# EAGLE board finacbv1 (EAGLE 9.1.0)

Size 100 x 80 mm. Coordinates in mm from the lower left corner, seen from the top.
Outline: 0,0 100,0 100,80 0,80 0,0
Copper layers (1*16): Top 0.035mm / dielectric 1.5mm / Bottom 0.035mm
Design rules "default": minimum track width 6mil, minimum drill 0.35mm, track to track 6mil, track to pad 6mil, pad to pad 6mil, via to via 6mil, smd to smd 6mil, copper to edge 40mil, drill to drill 6mil, minimum pad ring 10mil, minimum via ring 8mil, stop-mask expansion 4mil, vias tented up to drill 0mil, thermal gap 10mil

## Footprints (pad centres in the part's own frame; a part is rotated, then mirrored left to right if it is on the bottom)
C0603 = smd 0.889 x 0.889: 1 0,0.762; 2 0,-0.762
C0805 = smd 1.397 x 1.016: 1 0,1.016; 2 0,-1.016
0603-CAP = smd 1.1 x 1: 1 -0.85,0; 2 0.85,0
0402-CAP = smd 0.7 x 0.9: 1 -0.65,0; 2 0.65,0
HC49US = drill 0.813: 1 -2.413,0; 2 2.413,0
TC26H = drill 0.635: 1 -0.686,0; 2 0.686,0
LQFP64-05 = smd 1.2 x 0.25: 1 -5.915,3.759; 2 -5.915,3.251; 3 -5.915,2.743; 4 -5.915,2.261; 5 -5.915,1.753; 6 -5.915,1.245; 7 -5.915,0.762; 8 -5.915,0.254; 9 -5.915,-0.254; 10 -5.915,-0.762; 11 -5.915,-1.245; 12 -5.915,-1.753; 13 -5.915,-2.261; 14 -5.915,-2.743; 15 -5.915,-3.251; 16 -5.915,-3.759; 33 5.915,-3.759; 34 5.915,-3.251; 35 5.915,-2.743; 36 5.915,-2.261; 37 5.915,-1.753; 38 5.915,-1.245; 39 5.915,-0.762; 40 5.915,-0.254; 41 5.915,0.254; 42 5.915,0.762; 43 5.915,1.245; 44 5.915,1.753; 45 5.915,2.261; 46 5.915,2.743; 47 5.915,3.251; 48 5.915,3.759 | smd 0.25 x 1.2: 17 -3.759,-5.915; 18 -3.251,-5.915; 19 -2.743,-5.915; 20 -2.261,-5.915; 21 -1.753,-5.915; 22 -1.245,-5.915; 23 -0.762,-5.915; 24 -0.254,-5.915; 25 0.254,-5.915; 26 0.762,-5.915; 27 1.245,-5.915; 28 1.753,-5.915; 29 2.261,-5.915; 30 2.743,-5.915; 31 3.251,-5.915; 32 3.759,-5.915; 49 3.759,5.915; 50 3.251,5.915; 51 2.743,5.915; 52 2.261,5.915; 53 1.753,5.915; 54 1.245,5.915; 55 0.762,5.915; 56 0.254,5.915; 57 -0.254,5.915; 58 -0.762,5.915; 59 -1.245,5.915; 60 -1.753,5.915; 61 -2.261,5.915; 62 -2.743,5.915; 63 -3.251,5.915; 64 -3.759,5.915
LQFP32-08 = smd 1.3 x 0.4: 1 -4.493,2.8; 2 -4.493,2; 3 -4.493,1.2; 4 -4.493,0.4; 5 -4.493,-0.4; 6 -4.493,-1.2; 7 -4.493,-2; 8 -4.493,-2.8; 17 4.493,-2.8; 18 4.493,-2; 19 4.493,-1.2; 20 4.493,-0.4; 21 4.493,0.4; 22 4.493,1.2; 23 4.493,2; 24 4.493,2.8 | smd 0.4 x 1.3: 9 -2.8,-4.493; 10 -2,-4.493; 11 -1.2,-4.493; 12 -0.4,-4.493; 13 0.4,-4.493; 14 1.2,-4.493; 15 2,-4.493; 16 2.8,-4.493; 25 2.8,4.493; 26 2,4.493; 27 1.2,4.493; 28 0.4,4.493; 29 -0.4,4.493; 30 -1.2,4.493; 31 -2,4.493; 32 -2.8,4.493
LED-0805 = smd 0.889 x 1.27: + -0.889,0; - 0.889,0
F0805 = smd 1.397 x 1.016: 1 0,0.889; 2 0,-0.889
L0603 = smd 0.889 x 0.889: 1 -0.762,0; 2 0.762,0
R0603 = smd 0.889 x 0.889: 1 0,0.762; 2 0,-0.762
SOT-23 = smd 1.016 x 1.143: 1 -0.889,-1.016; 2 0.889,-1.016; 3 0,1.016
0603-RES = smd 1.1 x 1: 1 -0.85,0; 2 0.85,0
0402-RES = smd 0.7 x 0.9: 1 -0.65,0; 2 0.65,0
ALPS_SKHH = drill 1.016 pad 1.88: 1 -3.251,2.261; 2 3.251,2.261; 3 -3.251,-2.261; 4 3.251,-2.261; 5 0,-4.1
SOLDERJUMPER = smd 1.168 x 1.6: 1 -0.762,0; 2 0.762,0
SJ_3_PASTE2&3 = smd 0.635 x 1.27: 1 -0.813,0; 2 0,0; 3 0.813,0
SJ_2S-TRACE = smd 0.635 x 1.27: 1 -0.508,0; 2 0.508,0
SJ = smd 1.168 x 1.6: 1 -0.762,0; 2 0.762,0
PTH_39MIL = drill 0.991: 1 0,0
SOT-223 = smd 1.27 x 2.286: 1 -2.286,-3.175; 2 0,-3.175; 3 2.286,-3.175 | smd 3.556 x 2.159: PAD 0,3.175
QFN-24-4MM2 = smd 1.016 x 0.254: 1 -2.066,1.257; 2 -2.066,0.75; 3 -2.066,0.247; 4 -2.066,-0.287; 5 -2.066,-0.792; 6 -2.066,-1.297; 13 2.086,-1.297; 14 2.086,-0.792; 15 2.086,-0.287; 16 2.086,0.247; 17 2.086,0.75; 18 2.086,1.257 | smd 0.254 x 1.016: 7 -1.267,-2.122; 8 -0.762,-2.122; 9 -0.258,-2.122; 10 0.278,-2.122; 11 0.78,-2.122; 12 1.287,-2.122; 19 1.287,2.082; 20 0.78,2.082; 21 0.278,2.082; 22 -0.258,2.082; 23 -0.762,2.082; 24 -1.267,2.082 | smd 2.616 x 2.616: P$1 0.02,-0.01
16LPCC = smd 0.65 x 0.28: 1 -1.37,0.75; 2 -1.37,0.25; 3 -1.37,-0.25; 4 -1.37,-0.75; 9 1.37,-0.75; 10 1.37,-0.25; 11 1.37,0.25; 12 1.37,0.75 | smd 0.28 x 0.65: 5 -0.75,-1.37; 6 -0.25,-1.37; 7 0.25,-1.37; 8 0.75,-1.37; 13 0.75,1.37; 14 0.25,1.37; 15 -0.25,1.37; 16 -0.75,1.37
BLUETOOTH_SMD = smd 2 x 1: 1 -6.35,3.81; 2 -6.35,2.31; 3 -6.35,0.81; 4 -6.35,-0.69; 5 -6.35,-2.19; 6 -6.35,-3.69; 7 -6.35,-5.19; 8 -6.35,-6.69; 9 -6.35,-8.19; 10 -6.35,-9.69; 11 -6.35,-11.19; 12 -6.35,-12.69; 13 -6.35,-14.19; 22 6.65,-14.19; 23 6.65,-12.69; 24 6.65,-11.19; 25 6.65,-9.69; 26 6.65,-8.19; 27 6.65,-6.69; 28 6.65,-5.19; 29 6.65,-3.69; 30 6.65,-2.19; 31 6.65,-0.69; 32 6.65,0.81; 33 6.65,2.31; 34 6.65,3.81 | smd 1 x 1.8: 14 -5.1,-15.94; 15 -3.6,-15.94; 16 -2.1,-15.94; 17 -0.6,-15.94; 18 0.9,-15.94; 19 2.4,-15.94; 20 3.9,-15.94; 21 5.4,-15.94
MOLEX_SD-67503-010 = smd 2.54 x 0.508: 1 2.819,1.6; 2 2.819,0.8; 3 2.819,0; 4 2.819,-0.8; 5 2.819,-1.6 | smd 3.5 x 2: P$1 -2.121,-4.5; P$2 -2.121,4.5 | smd 3.2 x 2: P$3 2.544,-4.5; P$4 2.544,4.5 | drill 0.95: P$5 0,2.2; P$6 0,-2.2

## Placement (x,y rotation side)
C1  0.1uF  [C0603]  -24.13,58.42 0 top  (outside the outline)
C2  2.2uF  [C0805]  -46.99,45.72 0 top  (outside the outline)
C3  2.2uF  [C0805]  -53.34,45.72 0 top  (outside the outline)
C4  0.1uF  [C0603]  -29.21,58.42 0 top  (outside the outline)
C5  0.1uF  [C0603]  -34.29,58.42 0 top  (outside the outline)
C6  2.2uF  [C0805]  -59.69,45.72 0 top  (outside the outline)
C7  0.1uF  [C0603]  -39.37,58.42 0 top  (outside the outline)
C8  0.1uF  [C0603]  -44.45,58.42 0 top  (outside the outline)
C9  0.1uF  [C0603]  -49.53,58.42 0 top  (outside the outline)
C10  22pF  [C0603]  -54.61,58.42 0 top  (outside the outline)
C11  22pF  [C0603]  -59.69,58.42 0 top  (outside the outline)
C12  0.1uF  [C0603]  -15.24,63.5 0 top  (outside the outline)
C13  0.1uF  [0603-CAP]  -29.21,63.5 0 top  (outside the outline)
C14  2.2nF  [0603-CAP]  -33.02,63.5 0 top  (outside the outline)
C15  0.1uF  [0603-CAP]  -36.83,63.5 0 top  (outside the outline)
C16  10nF  [0603-CAP]  -40.64,63.5 0 top  (outside the outline)
C17  .1uF  [0402-CAP]  -15.24,67.31 0 top  (outside the outline)
C18  .22uF  [0402-CAP]  -19.05,67.31 0 top  (outside the outline)
C19  4.7uF  [0402-CAP]  -22.86,67.31 0 top  (outside the outline)
C20  2.2uF  [C0805]  -15.24,53.34 0 top  (outside the outline)
G1  16MHz  [HC49US]  -19.05,46.99 0 top  (outside the outline)
G2  32.768kHz  [TC26H]  -58.42,1.27 0 top  (outside the outline)
K1  MK20DX256VLH7  [LQFP64-05]  82.55,8.89 0 top
K2  MKL04Z32VLC4  [LQFP32-08]  -49.53,6.35 0 top  (outside the outline)
P1  [LED-0805]  -19.05,57.15 0 top  (outside the outline)
R1  FUSE  [F0805]  -21.59,53.34 0 top  (outside the outline)
R2  [L0603]  -19.05,62.23 0 top  (outside the outline)
R3  470R  [R0603]  -46.99,54.61 0 top  (outside the outline)
R4  [L0603]  -24.13,62.23 0 top  (outside the outline)
R5  33R  [R0603]  -52.07,54.61 0 top  (outside the outline)
R6  33R  [R0603]  -57.15,54.61 0 top  (outside the outline)
R7  [SOT-23]  -41.91,44.45 0 top  (outside the outline)
R8  470R  [R0603]  -62.23,54.61 0 top  (outside the outline)
R9  10k  [0603-RES]  -44.45,63.5 0 top  (outside the outline)
R10  10k  [0603-RES]  -48.26,63.5 0 top  (outside the outline)
R11  DNP  [0402-RES]  -26.67,67.31 0 top  (outside the outline)
R12  DNP  [0402-RES]  -30.48,67.31 0 top  (outside the outline)
S1  [ALPS_SKHH]  -30.48,39.37 0 top  (outside the outline)
SJ1  [SOLDERJUMPER]  -15.24,58.42 0 top  (outside the outline)
SJ2  [SJ_3_PASTE2&3]  -59.69,62.23 0 top  (outside the outline)
SJ3  [SJ_2S-TRACE]  -52.07,62.23 0 top  (outside the outline)
SJ4  [SJ_2S-TRACE]  -55.88,62.23 0 top  (outside the outline)
SJ5  [SJ]  -26.67,52.07 0 top  (outside the outline)
SJ6  [SJ]  -31.75,52.07 0 top  (outside the outline)
SJ7  [SJ]  -36.83,52.07 0 top  (outside the outline)
SJ8  [SJ]  -41.91,52.07 0 top  (outside the outline)
SX1  PIN  [PTH_39MIL]  -34.29,67.31 0 top  (outside the outline)
SX2  PIN  [PTH_39MIL]  -36.83,67.31 0 top  (outside the outline)
SX3  PIN  [PTH_39MIL]  -39.37,67.31 0 top  (outside the outline)
SX4  PIN  [PTH_39MIL]  -41.91,67.31 0 top  (outside the outline)
SX5  PIN  [PTH_39MIL]  -44.45,67.31 0 top  (outside the outline)
SX6  PIN  [PTH_39MIL]  -46.99,67.31 0 top  (outside the outline)
SX7  PIN  [PTH_39MIL]  -49.53,67.31 0 top  (outside the outline)
SX8  PIN  [PTH_39MIL]  -52.07,67.31 0 top  (outside the outline)
SX11  PIN  [PTH_39MIL]  -54.61,67.31 0 top  (outside the outline)
SX12  PIN  [PTH_39MIL]  -57.15,67.31 0 top  (outside the outline)
SX13  PIN  [PTH_39MIL]  -59.69,67.31 0 top  (outside the outline)
SX14  PIN  [PTH_39MIL]  -62.23,67.31 0 top  (outside the outline)
SX15  PIN  [PTH_39MIL]  -13.97,69.85 0 top  (outside the outline)
SX16  PIN  [PTH_39MIL]  -16.51,69.85 0 top  (outside the outline)
SX17  PIN  [PTH_39MIL]  -19.05,69.85 0 top  (outside the outline)
SX18  PIN  [PTH_39MIL]  -21.59,69.85 0 top  (outside the outline)
SX19  PIN  [PTH_39MIL]  -24.13,69.85 0 top  (outside the outline)
SX20  PIN  [PTH_39MIL]  -26.67,69.85 0 top  (outside the outline)
SX21  PIN  [PTH_39MIL]  -29.21,69.85 0 top  (outside the outline)
SX22  PIN  [PTH_39MIL]  -31.75,69.85 0 top  (outside the outline)
SX23  PIN  [PTH_39MIL]  -34.29,69.85 0 top  (outside the outline)
SX24  PIN  [PTH_39MIL]  -36.83,69.85 0 top  (outside the outline)
SX25  PIN  [PTH_39MIL]  -39.37,69.85 0 top  (outside the outline)
SX26  PIN  [PTH_39MIL]  -41.91,69.85 0 top  (outside the outline)
SX27  PIN  [PTH_39MIL]  -44.45,69.85 0 top  (outside the outline)
SX28  PIN  [PTH_39MIL]  -46.99,69.85 0 top  (outside the outline)
SX29  PIN  [PTH_39MIL]  -49.53,69.85 0 top  (outside the outline)
SX30  PIN  [PTH_39MIL]  -52.07,69.85 0 top  (outside the outline)
SX31  PIN  [PTH_39MIL]  -54.61,69.85 0 top  (outside the outline)
SX32  PIN  [PTH_39MIL]  -57.15,69.85 0 top  (outside the outline)
SX33  PIN  [PTH_39MIL]  -59.69,69.85 0 top  (outside the outline)
SX34  PIN  [PTH_39MIL]  -62.23,69.85 0 top  (outside the outline)
SX35  PIN  [PTH_39MIL]  -13.97,72.39 0 top  (outside the outline)
SX36  PIN  [PTH_39MIL]  -16.51,72.39 0 top  (outside the outline)
SX37  PIN  [PTH_39MIL]  -19.05,72.39 0 top  (outside the outline)
SX38  PIN  [PTH_39MIL]  -21.59,72.39 0 top  (outside the outline)
SX39  PIN  [PTH_39MIL]  -24.13,72.39 0 top  (outside the outline)
SX40  PIN  [PTH_39MIL]  -26.67,72.39 0 top  (outside the outline)
SX41  PIN  [PTH_39MIL]  -29.21,72.39 0 top  (outside the outline)
SX42  PIN  [PTH_39MIL]  -31.75,72.39 0 top  (outside the outline)
SX43  PIN  [PTH_39MIL]  -34.29,72.39 0 top  (outside the outline)
SX44  PIN  [PTH_39MIL]  -36.83,72.39 0 top  (outside the outline)
SX45  PIN  [PTH_39MIL]  -39.37,72.39 0 top  (outside the outline)
SX46  PIN  [PTH_39MIL]  -41.91,72.39 0 top  (outside the outline)
SX47  PIN  [PTH_39MIL]  -44.45,72.39 0 top  (outside the outline)
SX48  PIN  [PTH_39MIL]  -46.99,72.39 0 top  (outside the outline)
SX49  PIN  [PTH_39MIL]  -49.53,72.39 0 top  (outside the outline)
SX50  PIN  [PTH_39MIL]  -52.07,72.39 0 top  (outside the outline)
SX51  PIN  [PTH_39MIL]  -54.61,72.39 0 top  (outside the outline)
SX52  PIN  [PTH_39MIL]  -57.15,72.39 0 top  (outside the outline)
SX53  PIN  [PTH_39MIL]  -59.69,72.39 0 top  (outside the outline)
SX54  PIN  [PTH_39MIL]  -62.23,72.39 0 top  (outside the outline)
SX55  PIN  [PTH_39MIL]  -13.97,74.93 0 top  (outside the outline)
SX56  PIN  [PTH_39MIL]  -16.51,74.93 0 top  (outside the outline)
SX57  PIN  [PTH_39MIL]  -19.05,74.93 0 top  (outside the outline)
SX58  PIN  [PTH_39MIL]  -21.59,74.93 0 top  (outside the outline)
SX59  PIN  [PTH_39MIL]  -24.13,74.93 0 top  (outside the outline)
SX60  PIN  [PTH_39MIL]  -26.67,74.93 0 top  (outside the outline)
T1  MCP1825S  [SOT-223]  -40.64,36.83 0 top  (outside the outline)
T2  MCP1825S  [SOT-223]  -50.8,36.83 0 top  (outside the outline)
U1  MPU-6050-1  [QFN-24-4MM2]  -36.83,45.72 0 top  (outside the outline)
U2  HMC5883LSMD  [16LPCC]  -30.48,45.72 0 top  (outside the outline)
U3  HC_05  [BLUETOOTH_SMD]  29.21,38.1 0 top
X1  MINI-USB  [MOLEX_SD-67503-010]  -19.05,36.83 0 top  (outside the outline)

## Library data of the parts
C1 C4 C5 C7-C9 C12 = t32_ref; DESC: 0.1uF / 16VDC / X7R; MF: Murata Electronics; MPN: GRM188R71C104KA01D; OC_MOUSER: 81-GRM39X104K16; PACKAGE: 0603; TYPE: Capacitor
C2 C3 C6 C20 = t32_ref; DESC: 2.2uF / 25 VDC / X7R; MF: Taiyo Yuden; MPN: TMK212B7225KG-TR; OC_MOUSER: 963-TMK212B7225KG-TR; PACKAGE: 0805; TYPE: Capacitor
C10 C11 = t32_ref; DESC: 22pF / 50VDC / C0G (NP0); MF: Vishay / Vitramon; MPN: VJ0603A220JXACW1BC; OC_MOUSER: 77-VJ0603A220JXACBC; PACKAGE: 0603; TYPE: Capacitor
C13-C19 R9-R12 SJ2-SJ4 U2 = SparkFun
G1 = t32_ref; DESC: 16MHz / 18pF / 10ppm; MF: ABRACON; MPN: ABL-16.000MHz-B1U; OC_MOUSER: 815-ABL-16-B1U; PACKAGE: HC-49US; TYPE: Crystal
G2 = t32_ref; DESC: 32.768kHz / 12.5pF / 20ppm; MF: Citizen FineDevice; MPN: CFS206-32.768KDZF-UB; OC_MOUSER: 695-CFS206-327KF-U; PACKAGE: TC-26H; TYPE: Crystal
K1 = t32_ref; DESC: MK20DX256VLH7; MF: NXP; MPN: MK20DX256VLH7; OC_MOUSER: 841-MK20DX256VLH7; PACKAGE: LQFP-64; TYPE: Microcontroller
K2 = t32_ref; DESC: MKL04Z32VLC4 (preprogrammed); MF: PJRC; MPN: IC_MKL04Z32_TQFP32; PACKAGE: LQFP-32; TYPE: Microcontroller
P1 = t32_ref; DESC: orange; MF: ROHM Semiconductor; MPN: SML-211DTT86; OC_MOUSER: 755-SML-211DTT86; PACKAGE: 0805; TYPE: LED
R1 = t32_ref; DESC: 6V / 0.5A; MF: Bel Fuse; MPN: 0ZCK0050FF2E; OC_MOUSER: 530-0ZCK0050FF2E; PACKAGE: 0805; TYPE: PPTC
R2 R4 = t32_ref; DESC: 600R / 100MHz; MF: Murata Electronics; MPN: BLM18AG601SN1D; OC_MOUSER: 81-BLM11A601S; PACKAGE: 0603; TYPE: Ferrite
R3 R8 = t32_ref; DESC: 470R / 1 % / 0.1 W; MF: Vishay; MPN: CRCW0603470RFKEA; OC_MOUSER: 71-CRCW0603-470-E3; PACKAGE: 0603; TYPE: Resistor
R5 R6 = t32_ref; DESC: 33R / 1% / 0.25 W; MF: Panasonic; MPN: ERJ-PA3F33R0V; OC_MOUSER: 667-ERJ-PA3F33R0V; PACKAGE: 0603; TYPE: Resistor
R7 = t32_ref; DESC: Dual Schottky, common cat; MF: NXP Semiconductors; MPN: BAT54C,215; OC_MOUSER: 771-BAT54C-T/R; PACKAGE: SOT-23; TYPE: Diode
S1 = t32_ref; DESC: SPST; MF: ALPS; MPN: SKHHPKA010; OC_MOUSER: 688-SKHHPK; PACKAGE: 6x6x5 MM; TYPE: Tactile switch
SJ1 SX1-SX8 SX11-SX60 = t32_ref
SJ5-SJ8 = jumper
T1 T2 = t32_ref; DESC: 3.3V 500mA; MF: Microchip Technology; MPN: MCP1825S-3302E/DB; OC_MOUSER: 579-MCP1825S-3302EDB; PACKAGE: SOT-223-3; TYPE: Voltage regulator
U1 = Testing
U3 = buetooth
X1 = t32_ref; DESC: MINI USB; MF: MOLEX; MPN: 0675031020; OC_MOUSER: 538-67503-1020; TYPE: Mini USB

## Nets
ADO: SJ2.2 U1.9
AUX_SCL: U1.7
AUX_SDA: U1.6
BRX: K1.49 SJ5.2 SX21.1
BTX: K1.46 SJ6.2 SX22.1
CLKIN: SJ4.2 U1.1
FSYNC: SJ3.2 U1.11
GND: C1.2 C2.2 C3.2 C4.2 C5.2 C9.2 C10.2 C11.2 C12.2 C13.2 C14.2 C15.2 C16.2 C17.2 C19.2 C20.2 K1.4 K1.31 K1.47 K2.5 K2.6 R4.1 R8.1 S1.3 S1.4 SJ2.3 SJ3.1 SJ4.1 SX32.1 SX42.1 SX50.1 SX53.1 SX55.1 SX60.1 T1.2 T1.PAD T2.2 T2.PAD U1.18 U2.9 U2.11 U3.13 X1.5 X1.P$1 X1.P$2 X1.P$3 X1.P$4 X1.P$5 X1.P$6
INT: U1.12
N$1: K2.7 SX59.1
N$2: K1.22 K2.16 SX58.1
N$3: K1.24 K2.17
N$4: C14.1 U1.20
N$5: C10.1 G1.1 K1.32
N$6: C11.1 G1.2 K1.33
N$7: G2.2 K1.19
N$8: G2.1 K1.20
N$9: K2.18 S1.1 S1.2 SX40.1
N$10: K1.5 R6.2
N$11: C8.1 K1.17
N$12: K1.34 K2.8 K2.25 SX38.1 SX56.1
N$13: C7.1 K1.14 R3.2 SX16.1
N$14: K1.6 R5.2
N$15: C6.1 K1.13 R2.1 R3.1
N$16: R6.1 X1.3
N$17: R5.1 X1.2
N$18: C3.1 R1.1 X1.1
N$19: K1.23 K2.10 X1.4
N$20: C13.1 U1.10
N$21: K1.45 SX5.1
N$22: K1.44 SX6.1
N$23: K1.63 SX7.1
N$24: K1.62 SX8.1
N$25: C18.1 U2.8
N$26: C18.2 U2.12
N$27: K1.36 SX11.1
N$28: K1.35 SX13.1
N$29: K1.43 SX15.1
N$30: K1.58 SX17.1
N$31: K1.50 P1.+ SX18.1
N$32: K1.52 SX19.1
N$33: K1.51 SX20.1
N$34: C20.1 T2.3 U3.12
N$35: SJ5.1 SJ7.2 U3.1
N$36: K1.60 SX23.1
N$37: K1.59 SX24.1
N$38: K1.61 SX25.1
N$39: K1.64 SX26.1
N$40: K1.29 SX27.1
N$41: K1.28 SX28.1
N$42: K1.57 SX29.1
N$43: SJ6.1 SJ8.2 U3.2
N$45: K1.12 SX33.1
N$46: K1.26 SX35.1
N$47: K1.41 SX36.1
N$48: K1.1 SX37.1
N$49: K1.56 SX39.1
N$50: K1.55 SX41.1
N$51: K1.53 SX43.1
N$52: P1.- R8.2
N$53: C6.2 C7.2 C8.2 K1.15 K1.16 R4.2 SX3.1
N$54: K1.18 SX52.1
N$55: K1.11 SX51.1
N$56: C19.1 U2.10
N$57: K1.27 SX49.1
N$58: K1.42 SX48.1
N$59: K1.2 SX47.1
N$60: K1.54 SX45.1
N$61: C1.1 SJ1.2 SX2.1 T1.1
N$63: R7.2 SX46.1
N$64: K1.10 SX12.1
N$65: K1.9 SX14.1
N$67: R1.2 SJ1.1 SX1.1
N$68: C9.1 K1.21 R7.3
N$69: C2.1 C4.1 C5.1 C12.1 K1.3 K1.7 K1.30 K1.48 K2.3 K2.4 R2.2 R7.1 SX4.1 SX34.1 SX44.1 SX54.1 T1.3
N$70: K1.25 K2.15 SX57.1
RX0: K1.39 SJ7.1 SX31.1
SCL: K1.37 R9.1 R11.1 U1.23 U2.1
SDA: K1.38 R10.1 R12.1 U1.24 U2.16
TX0: K1.40 SJ8.1 SX30.1
VIO: C16.1 U1.8
VUSB: C15.1 C17.1 R9.2 R10.2 R11.2 R12.2 SJ2.1 T2.1 U1.13 U2.2 U2.4 U2.13

## Tracks (layer width: path | path; a pad name or v marks a point on that pad's centre or on a via)
ADO  (1 unrouted)
BRX  (2 unrouted)
BTX  (2 unrouted)
CLKIN  (1 unrouted)
FSYNC  (1 unrouted)
GND  (48 unrouted)
N$1  (1 unrouted)
N$2  (2 unrouted)
N$3  (1 unrouted)
N$4  (1 unrouted)
N$5  (2 unrouted)
N$6  (2 unrouted)
N$7  (1 unrouted)
N$8  (1 unrouted)
N$9  (3 unrouted)
N$10  (1 unrouted)
N$11  (1 unrouted)
N$12  (4 unrouted)
N$13  (3 unrouted)
N$14  (1 unrouted)
N$15  (3 unrouted)
N$16  (1 unrouted)
N$17  (1 unrouted)
N$18  (2 unrouted)
N$19  (2 unrouted)
N$20  (1 unrouted)
N$21  (1 unrouted)
N$22  (1 unrouted)
N$23  (1 unrouted)
N$24  (1 unrouted)
N$25  (1 unrouted)
N$26  (1 unrouted)
N$27  (1 unrouted)
N$28  (1 unrouted)
N$29  (1 unrouted)
N$30  (1 unrouted)
N$31  (2 unrouted)
N$32  (1 unrouted)
N$33  (1 unrouted)
N$34  (2 unrouted)
N$35  (2 unrouted)
N$36  (1 unrouted)
N$37  (1 unrouted)
N$38  (1 unrouted)
N$39  (1 unrouted)
N$40  (1 unrouted)
N$41  (1 unrouted)
N$42  (1 unrouted)
N$43  (2 unrouted)
N$45  (1 unrouted)
N$46  (1 unrouted)
N$47  (1 unrouted)
N$48  (1 unrouted)
N$49  (1 unrouted)
N$50  (1 unrouted)
N$51  (1 unrouted)
N$52  (1 unrouted)
N$53  (6 unrouted)
N$54  (1 unrouted)
N$55  (1 unrouted)
N$56  (1 unrouted)
N$57  (1 unrouted)
N$58  (1 unrouted)
N$59  (1 unrouted)
N$60  (1 unrouted)
N$61  (3 unrouted)
N$63  (1 unrouted)
N$64  (1 unrouted)
N$65  (1 unrouted)
N$67  (2 unrouted)
N$68  (2 unrouted)
N$69  (16 unrouted)
N$70  (2 unrouted)
RX0  (2 unrouted)
SCL  (4 unrouted)
SDA  (4 unrouted)
TX0  (2 unrouted)
VIO  (1 unrouted)
VUSB  (11 unrouted)